# EAGLE board Op-amp Stereo Microphone Preamp (EAGLE 6.2)

Size 100 x 80 mm. Coordinates in mm from the lower left corner, seen from the top.
Outline: 0,0 100,0 100,80 0,80 0,0
Copper layers (1*16): Top 0.035mm / dielectric 1.5mm / Bottom 0.035mm
Design rules: minimum track width 10mil, minimum drill 24mil, track to track 8mil, track to pad 8mil, pad to pad 8mil, via to via 8mil, smd to smd 8mil, copper to edge 40mil, drill to drill 8mil, minimum pad ring 10mil, minimum via ring 8mil, stop-mask expansion 4mil, vias tented up to drill 0mil, thermal gap 10mil

## Footprints (pad centres in the part's own frame; a part is rotated, then mirrored left to right if it is on the bottom)
CPOL-RADIAL-100UF-25V = drill 0.7 pad 1.651 square: 1 1.27,0 | drill 0.7 pad 1.651: 2 -1.27,0
DIL08 = drill 0.813 long: 1 -3.81,-3.81; 2 -1.27,-3.81; 3 1.27,-3.81; 4 3.81,-3.81; 5 3.81,3.81; 6 1.27,3.81; 7 -1.27,3.81; 8 -3.81,3.81
MOLEX-1X4 = drill 1.016 pad 1.88 square: 1 0,0 | drill 1.016 pad 1.88: 2 2.54,0; 3 5.08,0; 4 7.62,0
1/6W-RES = drill 0.762: 1 -2.5,0; 2 2.5,0
AXIAL-0.4 = drill 0.9 pad 1.88: P$1 -5.08,0; P$2 5.08,0
AUDIO-JACK = drill 1.3 pad 2.184: RING 5,5; RSH 5,2.5; SLEEVE 0,0; TIP 5,-5; TSH 5,-2.5 | hole 1.2: 0,5; -2.5,5; -2.5,-5; 0,-5; 5,0
3362U = drill 1.016 pad 1.88 square: P$1 0,2.54 | drill 1.016 pad 1.88: P$2 2.54,2.54; P$3 5.08,2.54

## Placement (x,y rotation side)
C1  10u  [CPOL-RADIAL-100UF-25V]  29.21,34.29 90 top
C2  10u  [CPOL-RADIAL-100UF-25V]  36.83,36.83 90 top
C3  10u  [CPOL-RADIAL-100UF-25V]  15.24,54.61 90 top
C4  10u  [CPOL-RADIAL-100UF-25V]  15.24,45.72 0 top
C5  100u  [CPOL-RADIAL-100UF-25V]  44.45,49.53 90 top
C6  10u  [CPOL-RADIAL-100UF-25V]  31.75,64.77 270 top
C7  10u  [CPOL-RADIAL-100UF-25V]  39.37,62.23 270 top
IC1  AD822N  [DIL08]  33.02,49.53 0 top
JP2  [MOLEX-1X4]  6.35,45.72 90 top
R1  22k  [1/6W-RES]  29.21,43.18 180 top
R3  220  [AXIAL-0.4]  36.83,30.48 180 top
R5  47k  [AXIAL-0.4]  39.37,43.18 180 top
R7  47k  [AXIAL-0.4]  29.21,40.64 180 top
R11  22k  [1/6W-RES]  31.75,60.96 180 top
R12  220  [AXIAL-0.4]  39.37,68.58 180 top
R15  47k  [AXIAL-0.4]  41.91,55.88 180 top
R16  47k  [AXIAL-0.4]  31.75,58.42 180 top
U1  [AUDIO-JACK]  11.43,27.94 90 top
U$1  20k  [3362U]  52.07,35.56 90 top
U$2  20k  [3362U]  52.07,58.42 270 top

## Library data of the parts
C1-C7 JP2 R3 R5 R7 R11 R12 R15 R16 U1 = SparkFun
IC1 = analog-devices; OC_FARNELL: 1438581; OC_NEWARK: unknown
R1 U$1 U$2 = My Library

## Nets
GND: C5.2 IC1.4 JP2.2 R5.P$1 R15.P$1 U1.SLEEVE U$1.P$3 U$2.P$3
N$1: R3.P$1 U$1.P$1 U$1.P$2
N$2: C1.2 R3.P$2
N$3: C4.1 IC1.1 R1.2
N$4: C3.2 JP2.4
N$5: C1.1 IC1.2 R1.1
N$6: C2.1 IC1.3 R5.P$2 R7.P$1
N$7: C7.1 IC1.5 R15.P$2 R16.P$1
N$8: C2.2 U1.TIP
N$9: C7.2 U1.RING
N$10: R12.P$1 U$2.P$1 U$2.P$2
N$11: C6.2 R12.P$2
N$12: C6.1 IC1.6 R11.1
N$13: C4.2 JP2.1
N$14: C3.1 IC1.7 R11.2
VCC: C5.1 IC1.8 JP2.3 R7.P$2 R16.P$2

## Tracks (layer width: path | path; a pad name or v marks a point on that pad's centre or on a via)
GND  (7 unrouted)
N$1  (2 unrouted)
N$2  (1 unrouted)
N$3  (2 unrouted)
N$4  (1 unrouted)
N$5  (2 unrouted)
N$6  (3 unrouted)
N$7  (3 unrouted)
N$8  (1 unrouted)
N$9  (1 unrouted)
N$10  (2 unrouted)
N$11  (1 unrouted)
N$12  (2 unrouted)
N$13  (1 unrouted)
N$14  (2 unrouted)
VCC  (4 unrouted)